# Altium PCB Motor Driver.PcbDoc
Units mm, origin at the board's own origin, x right, y up, seen from the top; angles counter-clockwise.
Board outline 50 x 50 mm, 2 copper layers (Top Layer, Bottom Layer); 14 components, 17 nets, 60 pads, 11 vias.
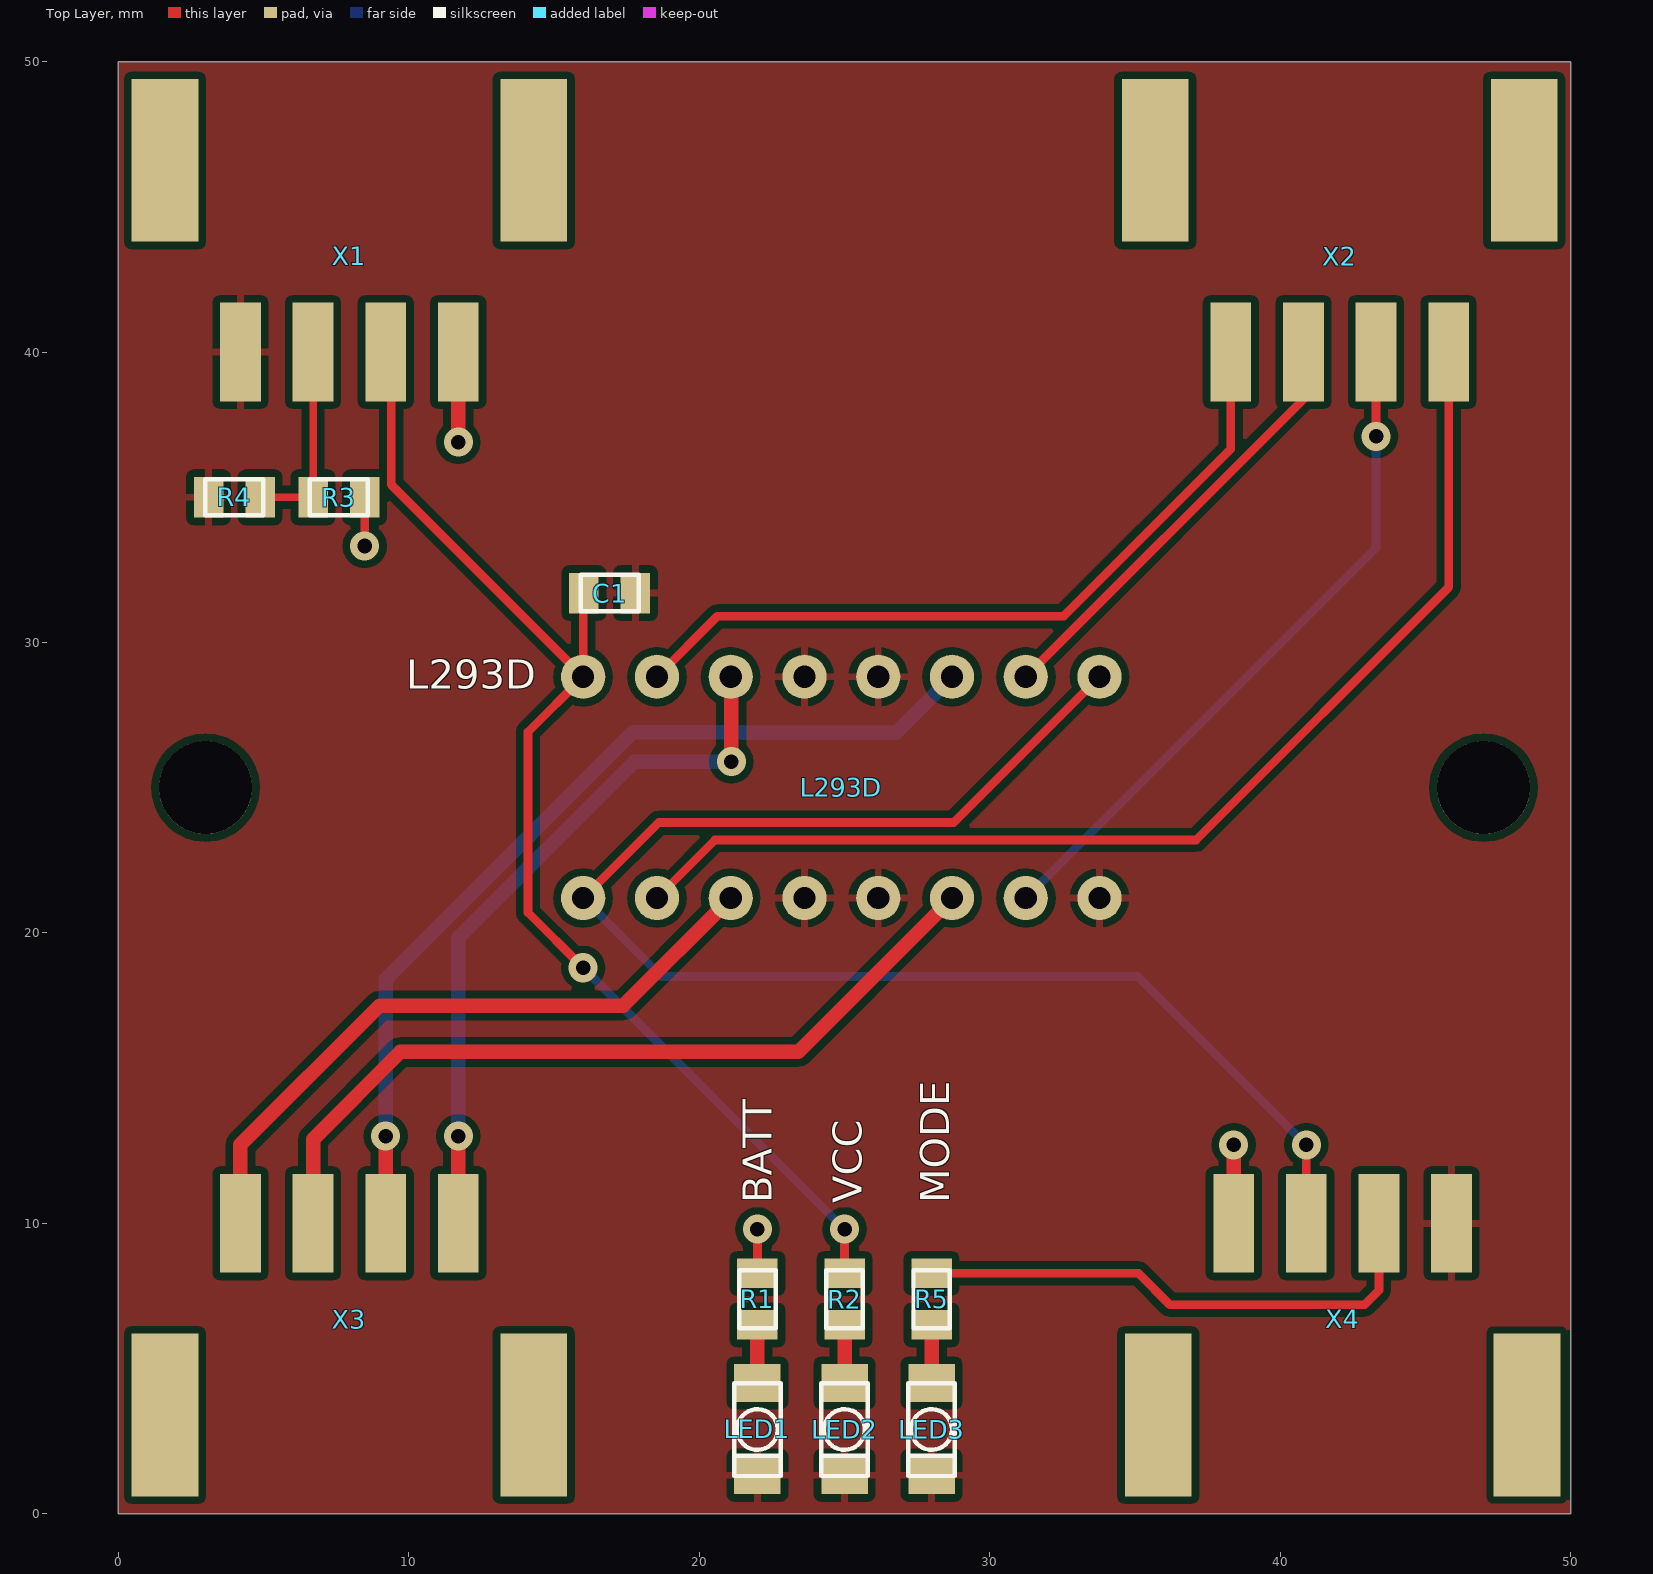
[diagram p0: Top Layer view]
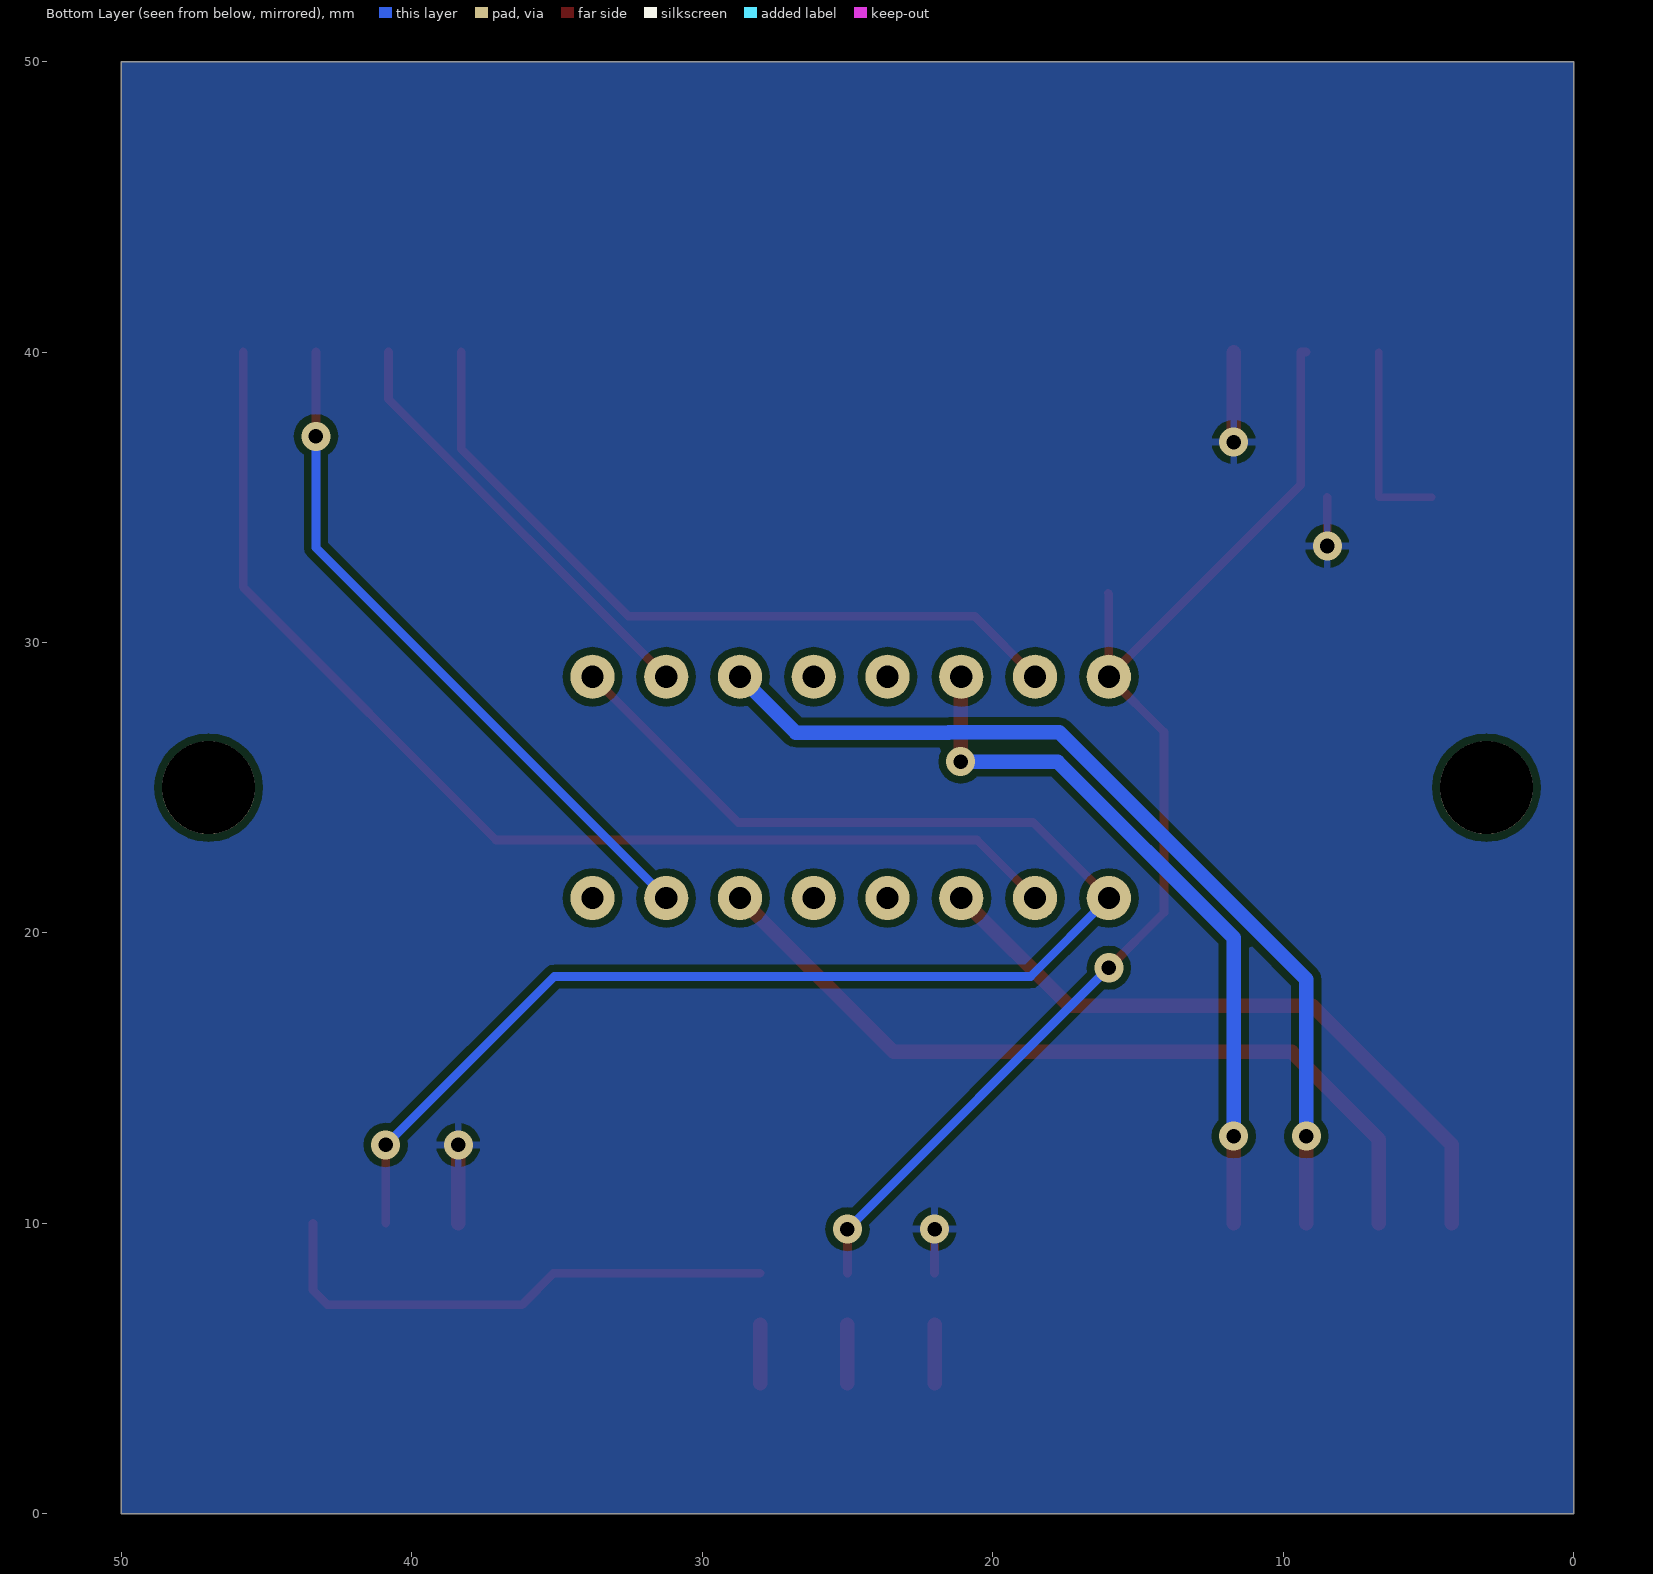
[diagram p1: Bottom Layer view, seen from below]
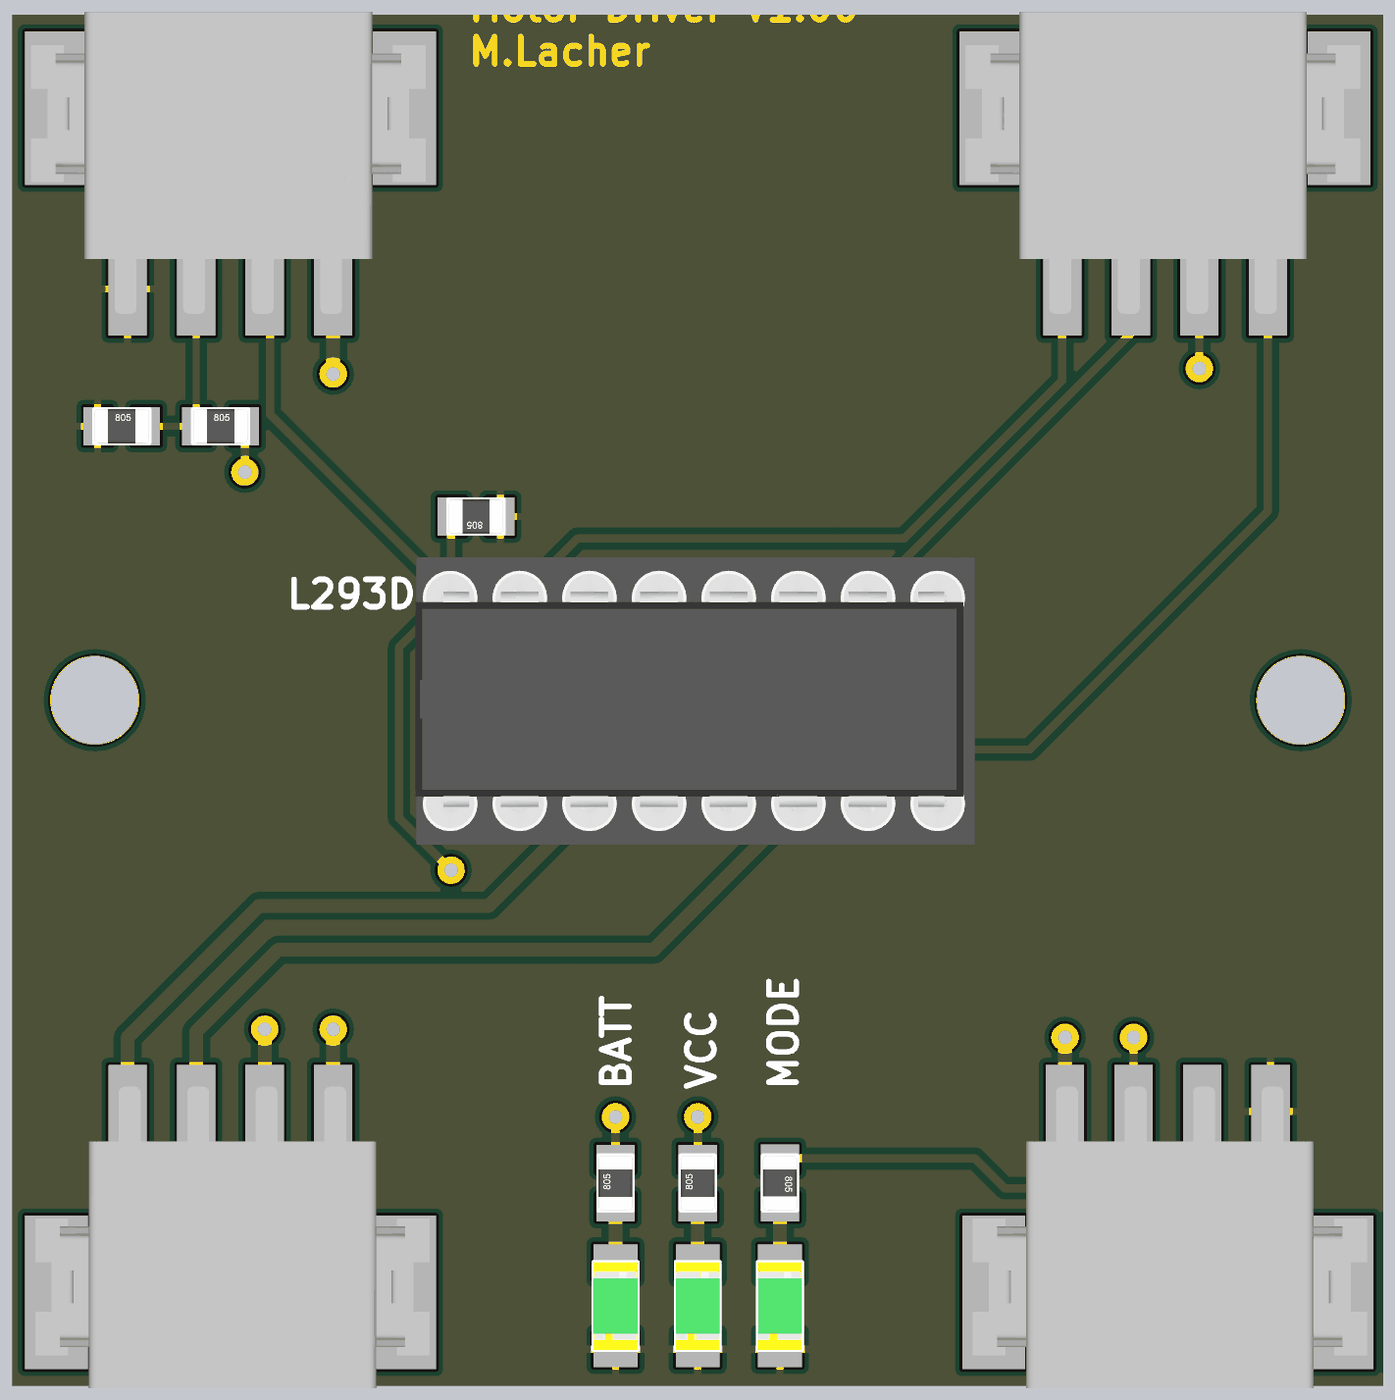
[diagram p2: 3D render of the assembled board from above, using the file's embedded part models]

## Layer stack, top to bottom
Top Solder: solder mask 0.0102, Solder Resist, Dk 3.5
Top Layer: signal copper 0.0356
Dielectric 1: dielectric 0.32, FR-4, Dk 4.8
Bottom Layer: signal copper 0.0356
Bottom Solder: solder mask 0.0102, Solder Resist, Dk 3.5

## Board outline
0,0 0,50 50,50 50,0

## Design rules (kind name [scope] priority, off if disabled: settings)
Clearance [All] p1: gap=0.254 ignorepadtopadclearanceinfootprint=FALSE except(0: Arc-Hole Track-Hole SMDPad-Hole THPad-Hole Via-Hole Fill-Hole Poly-Hole Region-Hole Text-Hole)
PolygonConnect [All] p1: connectstyle=Relief reliefconductorwidth=0.254 reliefentries=4 polygonreliefangle="90 Angle" airgapwidth=0.254
RoutingVias [All] p1: holewidth=0.5 width=1 viastyle="Through Hole" minholewidth=0.3 minwidth=0.6 maxholewidth=1 maxwidth=2
SolderMaskExpansion [All] p1: expansion=0.102
Width [All] p1: maxlimit=2 minlimit=0.2 preferedwidth=0.5 minimp=50.000000 maximp=50.000000 favimp=50.000000
30 further rules are at their usual default settings.

## Components (designator, comment, footprint, x,y, rotation, side; value= is the part's Value field where it differs from the comment)
C1 "100n" 0805_R 17.8,31.7 r180 top locked
L293D "L293D" DIP16 16,21.2 r0 top locked (schematic designator IC1)
LED1 "APT3216CGCK" LED_3216_GREEN 22,4.5 r270 top locked
LED2 "APT3216CGCK" LED_3216_GREEN 25,4.5 r270 top locked
LED3 "APT3216CGCK" LED_3216_GREEN 28,4.5 r270 top locked
R1 "Chip Resistor 10k, 0805, 1%" 0805_R 22,6.5 r90 top locked
R2 "Chip Resistor 10k, 0805, 1%" 0805_R 25,6.5 r90 top locked
R3 "Chip Resistor 10k, 0805, 1%" 0805_R 6.7,35 r0 top locked
R4 "Chip Resistor 10k, 0805, 1%" 0805_R 3.1,35 r0 top locked
R5 "Chip Resistor 10k, 0805, 1%" 0805_R 28,8.28 r270 top locked
X1 "Pin Header 4x1 2.54mm" "PTSM 0,5 4-2,5-H SMD" 11.7,40 r180 top locked
X2 "Pin Header 4x1 2.54mm" "PTSM 0,5 4-2,5-H SMD" 45.8,40 r180 top locked
X3 "Pin Header 4x1 2.54mm" "PTSM 0,5 4-2,5-H SMD" 4.2,10 r0 top locked
X4 "Pin Header 4x1 2.54mm" "PTSM 0,5 4-2,5-H SMD" 38.4,10 r0 top locked

## Footprints (in the part's own frame and the unit in brackets; to place one, negate y for a bottom-side part, rotate by r counter-clockwise, add the part's x,y. Pads: shape width x height; smd on the part's side, far side on the other; paste and mask are expansions set on the pad)
0805_R [mil]
  rect 40x55 smd: 1(0,0) 2(70,0)
  silkscreen extent -4,-25 74,25, body extent -4,-25 74,25, height 31
DIP16 [mil]
  round 60 hole 30: 1(0,0) 2(100,0) 3(200,0) 4(300,0) 5(400,0) 6(500,0) 7(600,0) 8(700,0) 9(700,300) 10(600,300) 11(500,300) 12(400,300) 13(300,300) 14(200,300) 15(100,300) 16(0,300)
  body extent -51,-58 752,355, height 317
LED_3216_GREEN [mm]
  rect 1.3x1.6 smd: A(0,0) K(3.175,0)
  silkscreen extent 0,-0.8 3.2,0.8, body extent 0,-0.8 3.2,0.8, height 1.11
"PTSM 0,5 4-2,5-H SMD" [mm] "4 Pol SMD"
  rect 2.3x5.6 smd: 0(-2.6,-6.6) 0(10.1,-6.6)
  rect 1.4x3.4 smd: 1(0,0) 2(2.5,0) 3(5,0) 4(7.5,0)
  body extent -3.37,-10.1 11.02,0.9, height 5

## Part data
C1: library part "Capacitor 0805", "Ceramic Capacitor 0805"
L293D: "Motor Driver, 1.2A Output"
LED1 LED2 LED3: library part LED, "LED SMD green APT3216CGCK", Manufacturer=Kingbright, Part Number=604-APT3216CGCK, Comment_1=APT-3216CGCK, Notes=-, Price=0.4, Supplier 1=Mouser, Supplier Part Number 1=APT3216CGCK
R1 R2 R3 R4 R5: library part RESISTOR, "Resistor 10k 0.125W 0805", Manufacturer=Vishay, Part Number=CRCW080510K0FKEAC, Supplier Part Number 1=71-CRCW080510K0FKEAC, Price=0.19, Supplier 1=Mouser
  R1: Comment_1=1.5k
  R2 R5: Comment_1=560
  R3: Comment_1=10k
  R4: Comment_1=2.5k
X1 X2 X3 X4: library part "PTSM 0,5/ 4-2,5-H SMD", "PTSM 4 Pol", Manufacturer="Phoenix Contacdt", Part Number=1814650, Supplier Part Number 1=651-1814650, Price=1.31, Supplier 1=Mouser

## Free pads (board coordinates)
  round 3.2 hole 3.2: 0(3,25) 0(47,25)

## Via types
v1: diameter 1, hole 0.5, Top Layer to Bottom Layer, 11 vias

## Nets (pads, with @x,y where several pads share a name; then routed paths per layer and width w, separated by ;. In a path a pad name is that pad's centre, name@x,y a point inside that pad or via, vN(x,y) a via of type N, cw(c..) or ccw(c..) an arc to the next point about the centre after c; other vN are vias at no path point)
GND: C1.1 L293D.4 L293D.5 L293D.8 L293D.12 L293D.13 LED1.K LED2.K LED3.K R4.1 X1.4 X4.4
NetIC1_1: L293D.1 L293D.9 X4.2 | length 52.1
  Top Layer w0.3: L293D.1 18.6,23.8 28.76,23.8 L293D.9 ; X4.2 v1(40.9,12.7)
  Bottom Layer w0.3: L293D.1 18.7,18.5 35.1,18.5 v1(40.9,12.7)
NetIC1_2: L293D.2 X2.1 | length 39.8
  Top Layer w0.3: L293D.2 20.54,23.2 37.1,23.2 45.8,31.9 X2.1
NetIC1_3: L293D.3 X3.1 | length 23.1
  Top Layer w0.5: X3.1 4.2,12.7 9,17.5 17.38,17.5 L293D.3
NetIC1_6: L293D.6 X3.2 | length 28.3
  Top Layer w0.5: X3.2 6.7,12.9 9.7,15.9 23.4,15.9 L293D.6
NetIC1_7: L293D.7 X2.2 | length 23.8
  Top Layer w0.3: v1(43.3,37.1) X2.2
  Bottom Layer w0.3: L293D.7 43.3,33.26 v1(43.3,37.1)
NetIC1_10: L293D.10 X2.3 | length 15.1
  Top Layer w0.3: L293D.10 40.8,38.38 X2.3
NetIC1_11: L293D.11 X3.3 | length 32.2
  Top Layer w0.5: X3.3 v1(9.2,13)
  Bottom Layer w0.5: v1(9.2,13) 9.2,18.4 17.704,26.904 21.516,26.904 21.52,26.9 26.78,26.9 L293D.11
NetIC1_14: L293D.14 X3.4 | length 24.7
  Top Layer w0.5: X3.4 v1(11.7,13) ; L293D.14 21.1,28.8 v1(21.1,25.9)
  Bottom Layer w0.5: v1(11.7,13) 11.7,19.834 17.766,25.9 v1(21.1,25.9)
NetIC1_15: L293D.15 X2.4 | length 26.3
  Top Layer w0.3: L293D.15 20.62,30.9 32.537,30.9 38.3,36.663 X2.4
NetLED1_A: LED1.A R1.1 | length 2
  Top Layer w0.5: LED1.A R1.1
NetLED2_A: LED2.A R2.1 | length 2
  Top Layer w0.5: LED2.A R2.1
NetLED3_A: LED3.A R5.2 | length 2
  Top Layer w0.5: LED3.A R5.2
NetR3_1: R3.1 R4.2 X1.3 | length 6.8
  Top Layer w0.254: R4.2 R3.1 X1.3
NetR5_1: R5.1 X4.3 | length 18.4
  Top Layer w0.3: R5.1 35.12,8.28 36.2,7.2 42.9,7.2 43.4,7.7 X4.3
Vbat: R1.2 R3.2 X1.1 X4.1 | length 9
  Top Layer w0.3: v1(8.478,33.322) R3.2 ; R1.2 v1(22,9.8)
  Top Layer w0.5: v1(11.7,36.9) X1.1 ; X4.1 v1(38.4,12.7)
VCC: C1.2 L293D.16 R2.2 X1.2 | length 42.8
  Top Layer w0.3: X1.2 9.39,40 9.39,35.43 L293D.16 ; v1(16,18.8) 14.1,20.7 14.1,26.92 L293D.16 ; C1.2 16,31.678 L293D.16 ; R2.2 v1(25,9.8)
  Bottom Layer w0.3: v1(16,18.8) v1(25,9.8)
pads on no net: X1.0 X2.0 X3.0 X4.0

## Polygon pours and split planes (outlines as drawn)
GND on Top Layer "GND" (solid, pour order 0): 0,0 0,50 50,50 50,0
Vbat on Bottom Layer "Vbat" (solid, pour order 2): 0,0 0,50 50,50 50,0

## Silkscreen, mask and mechanical layers (free items; w line width, h text height)
Top Overlay:
  text "L293D" at 9.9,28.4 h1
  text "BATT" at 22.5,10.7 h1 r90
  text "VCC" at 25.6,10.7 h1 r90
  text "MODE" at 28.6,10.7 h1 r90
Top Solder:
  text "Balancer Robot / Motor Driver V1.00 / M.Lacher" at 16.6,44.5 h1
Mechanical 1:
  the board outline again, w0.254